# EAGLE board Schematic_openbook v64 (EAGLE 9.7.0)
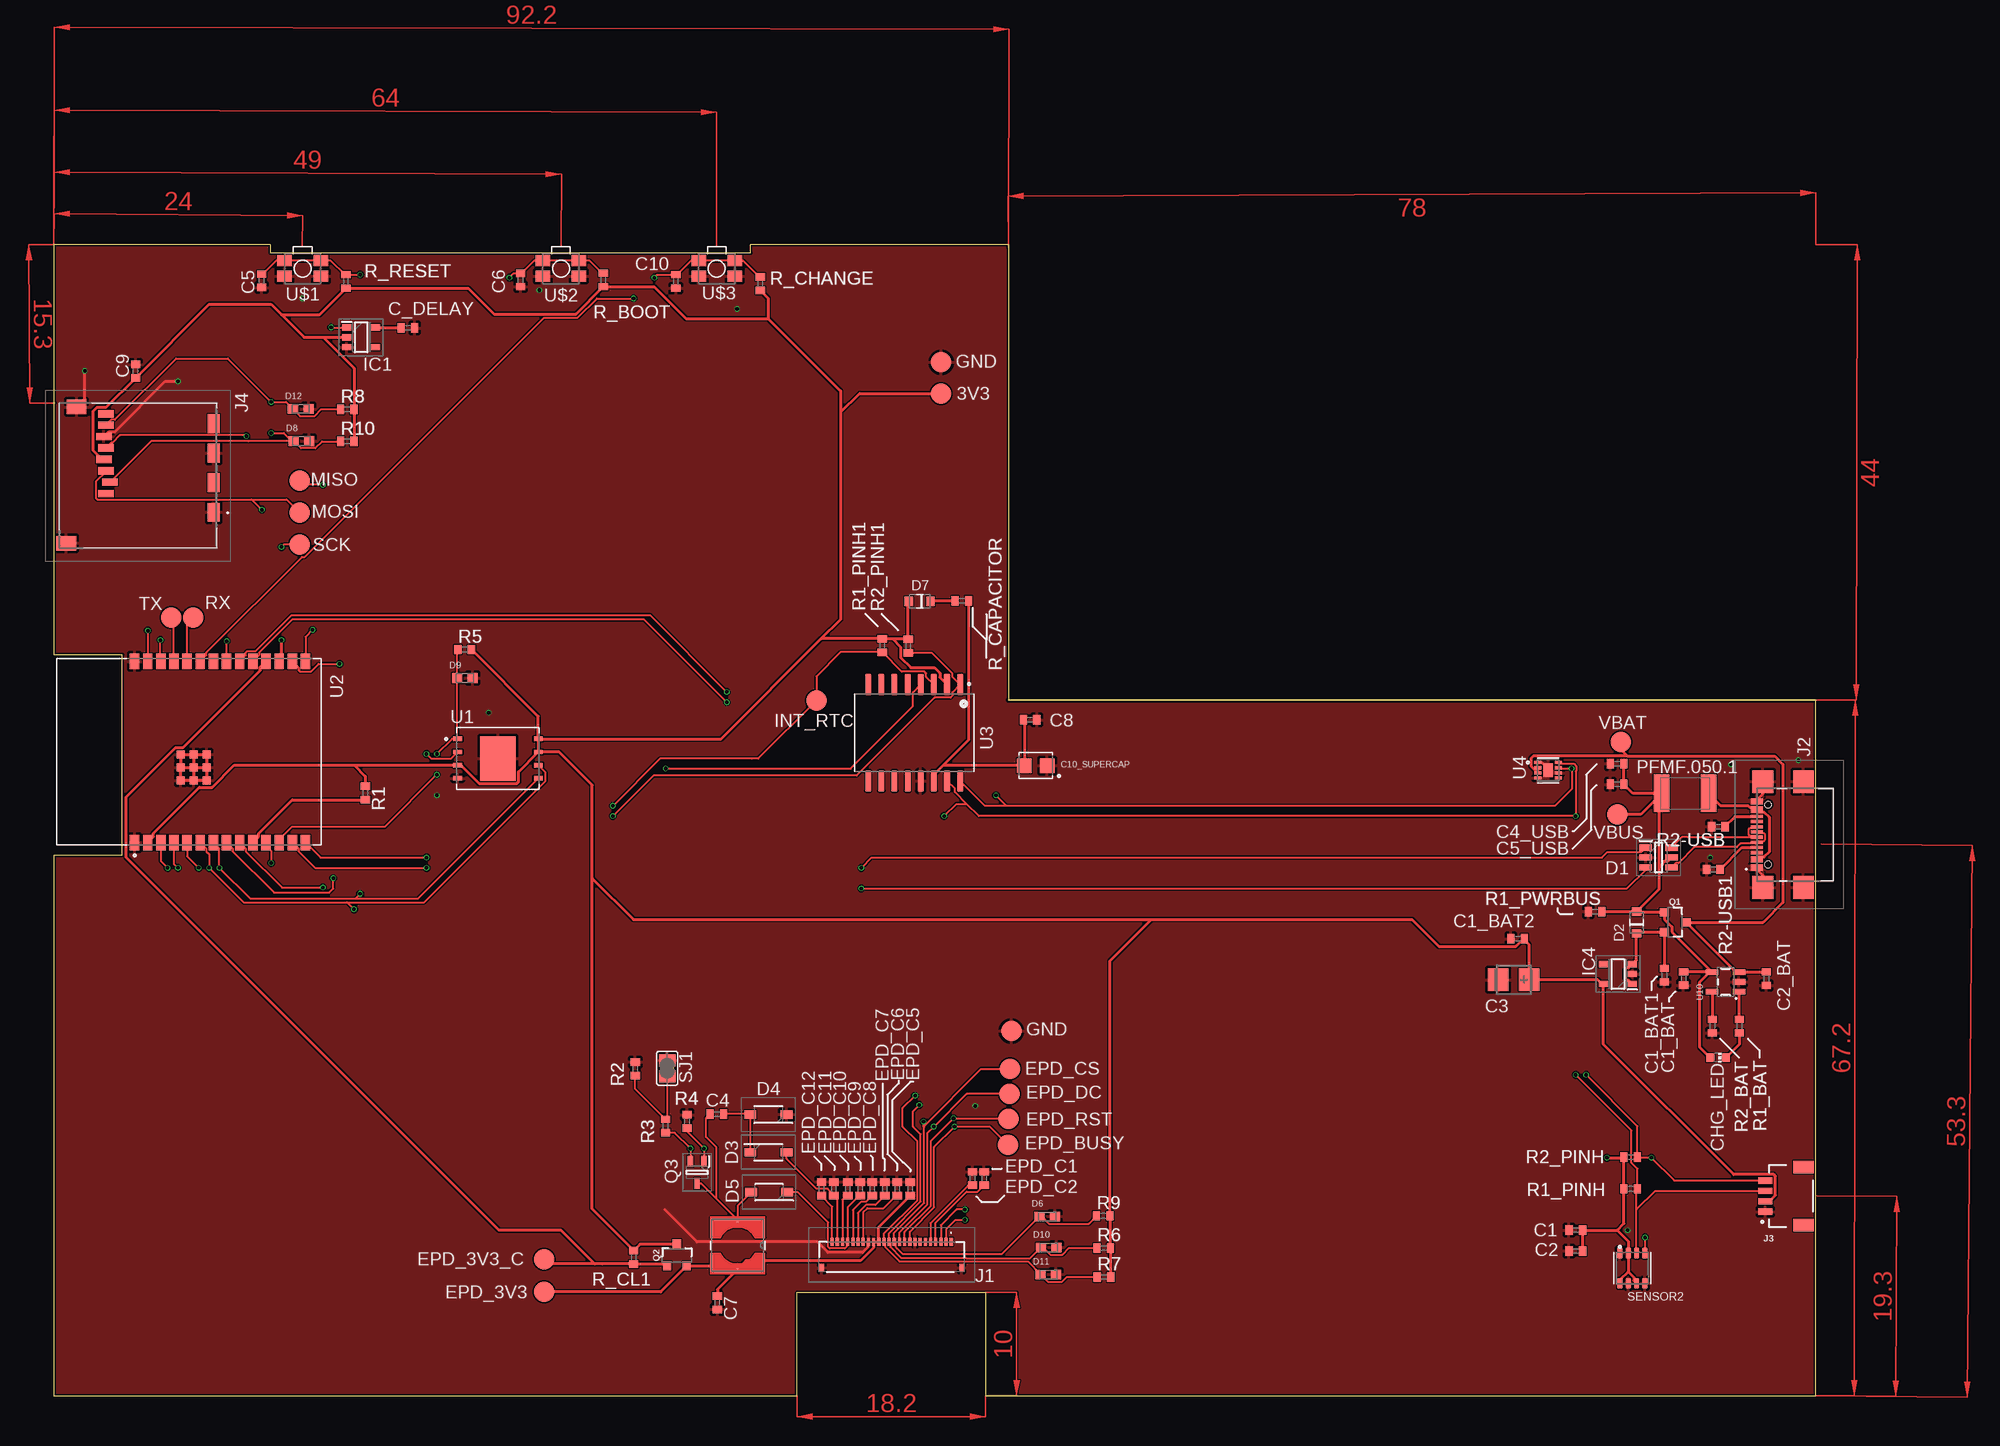
[diagram p0: board, top side]
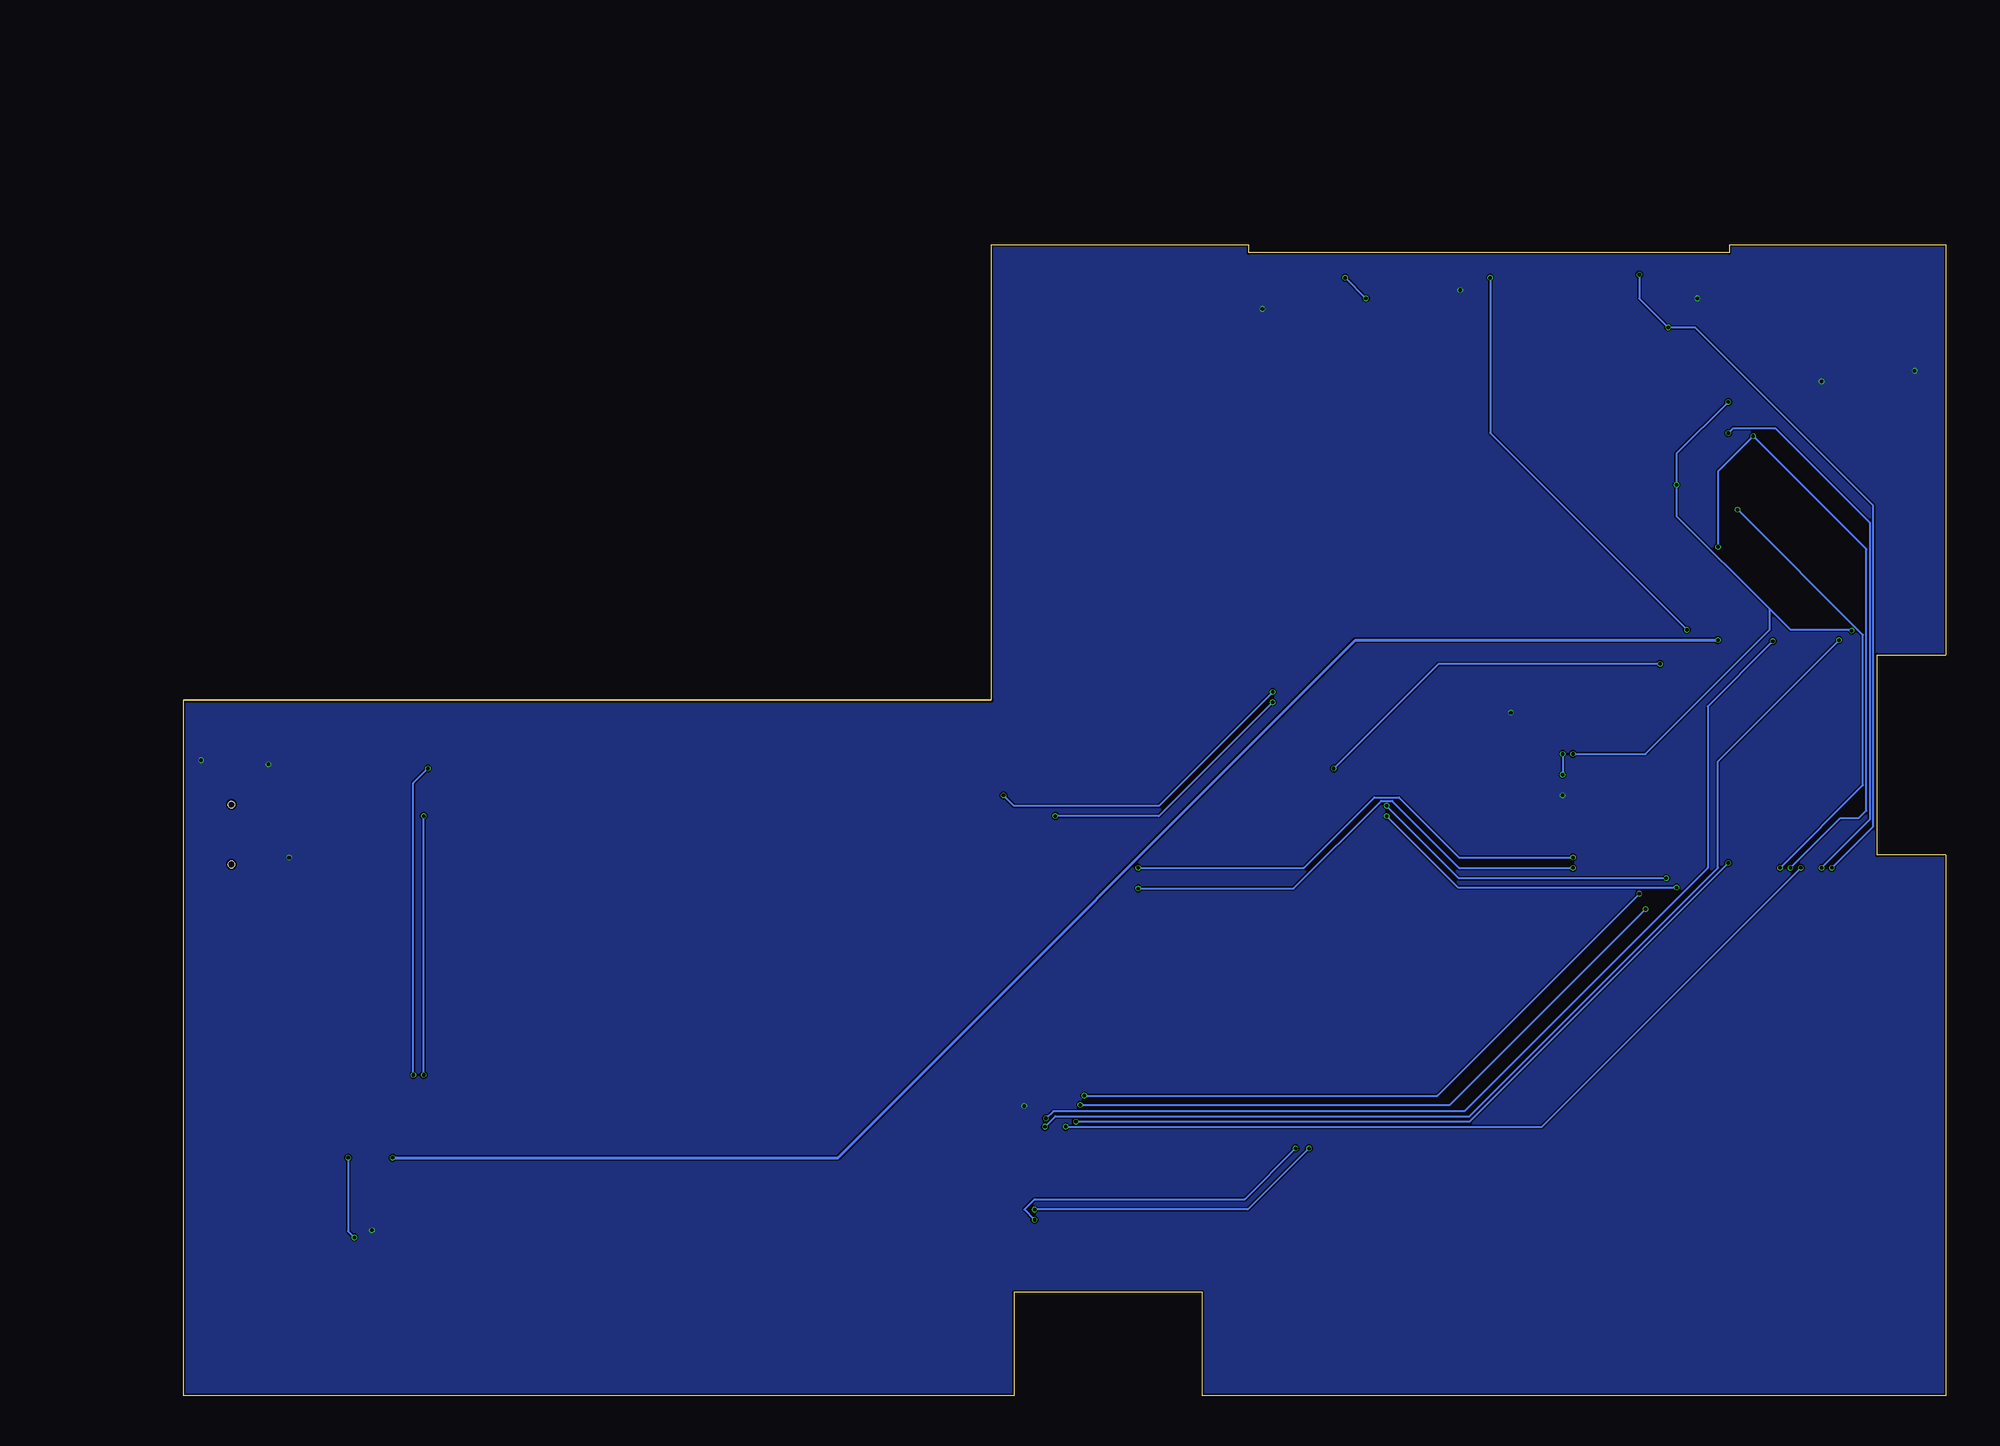
[diagram p1: board, bottom side, seen from below]

Size 170.2 x 111.2 mm. Coordinates in mm from the lower left corner, seen from the top.
Outline: 0,0 71.8,0 71.8,10 90,10 90,0 170.2,0 170.2,67.2 92.2,67.2 92.2,111.2 67.31,111.2 67.31,110.41 20.93,110.41 20.93,111.2 0,111.2 0,71.58 6.62,71.58 6.62,52.23 0,52.23 0,0
Copper layers (1*16): Top 0.035mm / dielectric 1.6mm / Bottom 0.035mm
Design rules "jlcpcb-2layers.dru *": minimum track width 5mil, minimum drill 0.3mm, track to track 5mil, track to pad 5mil, pad to pad 5mil, via to via 5mil, smd to smd 5mil, copper to edge 0.2mm, drill to drill 6mil, minimum pad ring 10mil, minimum via ring 3mil, stop-mask expansion 4mil, vias tented up to drill 0mil, thermal gap 10mil

## Footprints (pad centres in the part's own frame; a part is rotated, then mirrored left to right if it is on the bottom)
EAGLE-LTSPICE_C0402 = smd 0.7 x 0.9: 1 -0.65,0; 2 0.65,0
RCL_CT3528 = smd 2 x 2.2: + -1.5,0; - 1.5,0
CAPCP3225X100N = smd 1.4 x 1.4: 1 -1.1,0; 2 1.1,0
ADAFRUIT_CHIP-LED0603 = smd 0.8 x 0.8: A 0,-0.75; C 0,0.75
SOT95P280X145-6N = smd 1.2 x 0.6: 1 -1.25,0.95; 2 -1.25,0; 3 -1.25,-0.95; 4 1.25,-0.95; 5 1.25,0; 6 1.25,0.95
ESP32_WROVER_AVX---SD0805S020S1R0_AVX_SD0805S020S1R0_0 = smd 0.8 x 0.9: 1 -1.05,0; 2 1.05,0
SOD3716X135N = smd 1.15 x 0.8: 1 -1.75,0; 2 1.75,0
DIOC1608X36N = smd 0.97 x 0.94: 1 -0.75,0; 2 0.75,0
SOT95P280X125-5N = smd 0.9 x 0.6: 1 -1.4,0.95; 2 -1.4,0; 3 -1.4,-0.95; 4 1.4,-0.95; 5 1.4,0.95
SOT95P280X120-5N = smd 0.9 x 0.6: 1 -1.4,0.95; 2 -1.4,0; 3 -1.4,-0.95; 4 1.4,-0.95; 5 1.4,0.95
FH34SRJ24S05SH99 = smd 0.3 x 0.8: 1 5.75,1.45; 2 5.25,1.45; 3 4.75,1.45; 4 4.25,1.45; 5 3.75,1.45; 6 3.25,1.45; 7 2.75,1.45; 8 2.25,1.45; 9 1.75,1.45; 10 1.25,1.45; 11 0.75,1.45; 12 0.25,1.45; 13 -0.25,1.45; 14 -0.75,1.45; 15 -1.25,1.45; 16 -1.75,1.45; 17 -2.25,1.45; 18 -2.75,1.45; 19 -3.25,1.45; 20 -3.75,1.45; 21 -4.25,1.45; 22 -4.75,1.45; 23 -5.25,1.45; 24 -5.75,1.45 | smd 0.4 x 0.8: MP1 6.75,-1.05; MP2 -6.75,-1.05
SAMACSYS_PARTS_USB4110GFA = smd 0.3 x 1.15: A1 -3.35,3.678; A4 -2.55,3.678; A5 -1.25,3.678; A6 -0.25,3.678; A7 0.25,3.678; A8 1.25,3.678; A9 2.55,3.678; A12 3.35,3.678; B1 3.05,3.678; B4 2.25,3.678; B5 1.75,3.678; B6 0.75,3.678; B7 -0.75,3.678; B8 -1.75,3.678; B9 -2.25,3.678; B12 -3.05,3.678 | smd 2.18 x 2: MP1 -5.11,-0.827; MP2 5.11,-0.827; MP3 -5.11,3.103; MP4 5.11,3.103 | hole 0.65: -2.89,2.603; 2.89,2.603
JST04_1MM_RA = smd 0.6 x 1.35: 1 -1.5,0; 2 -0.5,0; 3 0.5,0; 4 1.5,0 | smd 1.2 x 2: NC1 2.8,-3.675; NC2 -2.8,-3.675
112ATAARR03ATTEND = smd 1.8 x 1.2: G1 10.6,10.4; G2 4.9,10.4; S1 7.75,10.4; S2 2.05,10.4 | smd 1.4 x 1.9: G3 13.6,-3.85; G4 0.45,-2.85 | smd 0.7 x 1.5: P1 8.8,0; P2 7.7,0.4; P3 6.6,0; P4 5.5,-0.2; P5 4.4,0; P6 3.3,-0.2; P7 2.2,0; P8 1.1,0
IND_4828-WE-TPC_WRE = smd 0.127 x 0.127: 1 -2.286,0; 2 2.286,0
ESP32C6_VARISTOR_CT/CN1812 = smd 1.5 x 3.6: 1 -2.25,0; 2 2.25,0
ESP32_WROVER_SPARKFUN-DISCRETESEMI_SOT23-3 = smd 0.8 x 0.9: 1 -0.95,-1; 2 0.95,-1; 3 0,1.1
SOT65P210X110-3N = smd 1.05 x 0.5: 1 -1.05,0.65; 2 -1.05,-0.65; 3 1.05,0
ESP32_WROVER_EAGLE-LTSPICE_R0402 = smd 0.7 x 0.9: 1 -0.65,0; 2 0.65,0
ESP32_WROVER_BME680_PSON80P300X300X100-8N = smd 1.016 x 0.5: 1 1.458,1.2; 2 1.458,0.4; 3 1.458,-0.4; 4 1.458,-1.2; 5 -1.458,-1.22; 6 -1.458,-0.4; 7 -1.458,0.4; 8 -1.458,1.2
SJ = smd 1.168 x 1.6: 1 -0.762,0; 2 0.762,0
TP20R = smd 2 x 2: TP 0,0
SON127P600X800X80-9N = smd 0.94 x 0.44: 1 -3.895,1.905; 2 -3.895,0.635; 3 -3.895,-0.635; 4 -3.895,-1.905; 5 3.895,-1.905; 6 3.895,-0.635; 7 3.895,0.635; 8 3.895,1.905 | smd 3.4 x 4.3: 9 0,0
XCVR_ESP32-C6-WROOM-1-N8 = smd 1.5 x 0.9: 1 -8.75,5.26; 2 -8.75,3.99; 3 -8.75,2.72; 4 -8.75,1.45; 5 -8.75,0.18; 6 -8.75,-1.09; 7 -8.75,-2.36; 8 -8.75,-3.63; 9 -8.75,-4.9; 10 -8.75,-6.17; 11 -8.75,-7.44; 12 -8.75,-8.71; 13 -8.75,-9.98; 14 -8.75,-11.25; 15 8.75,-11.25; 16 8.75,-9.98; 17 8.75,-8.71; 18 8.75,-7.44; 19 8.75,-6.17; 20 8.75,-4.9; 21 8.75,-3.63; 22 8.75,-2.36; 23 8.75,-1.09; 24 8.75,0.18; 25 8.75,1.45; 26 8.75,2.72; 27 8.75,3.99; 28 8.75,5.26 | smd 0.8 x 0.8: 29_1 -2.755,0.79; 29_2 -1.505,0.79; 29_3 -0.255,0.79; 29_4 -2.755,-0.46; 29_5 -1.505,-0.46; 29_6 -0.255,-0.46; 29_7 -2.755,-1.71; 29_8 -1.505,-1.71; 29_9 -0.255,-1.71
SOIC127P1032X265-16N = smd 2.05 x 0.59: 1 -4.655,4.445; 2 -4.655,3.175; 3 -4.655,1.905; 4 -4.655,0.635; 5 -4.655,-0.635; 6 -4.655,-1.905; 7 -4.655,-3.175; 8 -4.655,-4.445; 9 4.655,-4.445; 10 4.655,-3.175; 11 4.655,-1.905; 12 4.655,-0.635; 13 4.655,0.635; 14 4.655,1.905; 15 4.655,3.175; 16 4.655,4.445
SON50P200X200X80-9N = smd 0.76 x 0.27: 1 -0.985,0.75; 2 -0.985,0.25; 3 -0.985,-0.25; 4 -0.985,-0.75; 5 0.985,-0.75; 6 0.985,-0.25; 7 0.985,0.25; 8 0.985,0.75 | smd 0.9 x 1.3: 9 0,0
ESP32_WROVER_SPARKFUN-IC-POWER_SOT23-5 = smd 0.55 x 1.2: 1 -0.95,-1.3; 2 0,-1.3; 3 0.95,-1.3; 4 0.95,1.3; 5 -0.95,1.3
MYBUTTON = smd 1.4 x 1.05: 1 1.75,0.75; 2 -1.75,0.75; 3 -1.75,-0.75; 4 1.75,-0.75

## Placement (x,y rotation side)
C1  100nF  [EAGLE-LTSPICE_C0402]  147,16 180 top
C1_BAT  4.7uF  [EAGLE-LTSPICE_C0402]  157.41,40.31 270 top
C1_BAT1  4.7uF  [EAGLE-LTSPICE_C0402]  155.55,40.63 270 top
C1_BAT2  4.7uF  [EAGLE-LTSPICE_C0402]  141.39,44.15 180 top
C2  100nF  [EAGLE-LTSPICE_C0402]  147,14 180 top
C2_BAT  4.7uF  [EAGLE-LTSPICE_C0402]  165.41,40.3 270 top
C3  100uF TANT  [RCL_CT3528]  140.99,40.2 180 top
C4  4.7uF/25V  [EAGLE-LTSPICE_C0402]  64.04,27.23 180 top
C4_USB  100nF  [EAGLE-LTSPICE_C0402]  151,61.07 180 top
C5  1uF  [EAGLE-LTSPICE_C0402]  20.09,107.71 270 top
C5_USB  4.7uF  [EAGLE-LTSPICE_C0402]  151,59.07 180 top
C6  100nF  [EAGLE-LTSPICE_C0402]  45.09,107.78 270 top
C7  10uF  [EAGLE-LTSPICE_C0402]  64.09,8.99 270 top
C8  100nF  [EAGLE-LTSPICE_C0402]  94.3,65.3 0 top
C9  100nF  [EAGLE-LTSPICE_C0402]  7.91,98.98 90 top
C10  100nF  [EAGLE-LTSPICE_C0402]  60.09,107.64 270 top
C10_SUPERCAP  CPH3225A  [CAPCP3225X100N]  94.85,60.88 180 top
C_DELAY  100nF  [EAGLE-LTSPICE_C0402]  34.21,103.15 0 top
CHG_LED  NA  [ADAFRUIT_CHIP-LED0603]  160.75,32.66 270 top
D1  USBLC6-2SC6Y  [SOT95P280X145-6N]  155,52 0 top
D2  ESP32_WROVER_AVX---SD0805S020S1R0_AVX_SD0805S020S1R0_0_0AVX_SD0805S020S1R0_0_0  [ESP32_WROVER_AVX---SD0805S020S1R0_AVX_SD0805S020S1R0_0]  152.86,45.71 90 top
D3  MBR0530  [SOD3716X135N]  69.03,23.53 0 top
D4  MBR0530  [SOD3716X135N]  69.03,27.17 180 top
D5  MBR0530  [SOD3716X135N]  69.09,19.67 180 top
D6  PGB1010603MR  [DIOC1608X36N]  95.95,17.33 0 top
D7  SD0805S020S1R0  [ESP32_WROVER_AVX---SD0805S020S1R0_AVX_SD0805S020S1R0_0]  83.64,76.76 180 top
D8  PGB1010603MR  [DIOC1608X36N]  23.93,92.23 0 top
D9  PGB1010603MR  [DIOC1608X36N]  39.71,69.33 0 top
D10  PGB1010603MR  [DIOC1608X36N]  96.09,14.33 0 top
D11  PGB1010603MR  [DIOC1608X36N]  96.07,11.73 0 top
D12  PGB1010603MR  [DIOC1608X36N]  23.85,95.33 0 top
EPD_C1  1uF/50V  [EAGLE-LTSPICE_C0402]  89.87,21 90 top
EPD_C2  1uF/50V  [EAGLE-LTSPICE_C0402]  88.74,21 90 top
EPD_C5  0.1uF/50V  [EAGLE-LTSPICE_C0402]  82.73,20 90 top
EPD_C6  1uF/50V  [EAGLE-LTSPICE_C0402]  81.47,20 90 top
EPD_C7  1uF/50V  [EAGLE-LTSPICE_C0402]  80.27,20 90 top
EPD_C8  1uF/50V  [EAGLE-LTSPICE_C0402]  79.07,20 90 top
EPD_C9  1uF/50V  [EAGLE-LTSPICE_C0402]  77.9,20 90 top
EPD_C10  1uF/50V  [EAGLE-LTSPICE_C0402]  76.68,20 90 top
EPD_C11  1uF/50V  [EAGLE-LTSPICE_C0402]  75.35,20 90 top
EPD_C12  1uF/50V  [EAGLE-LTSPICE_C0402]  74.15,20 90 top
IC1  BD5229G-TR  [SOT95P280X125-5N]  29.69,102.25 0 top
IC4  XC6220A331MR-G  [SOT95P280X120-5N]  151.07,40.75 180 top
J1  FH34SRJ-24S-0.5SH_99_  [FH34SRJ24S05SH99]  80.93,13.42 0 top
J2  SAMACSYS_PARTS_USB4110-GF-A  [SAMACSYS_PARTS_USB4110GFA]  168.17,54.22 90 top
J3  QWIIC_RIGHT_ANGLE  [JST04_1MM_RA]  165.32,19.3 90 top
J4  112A-TAAR-R03_ATTEND  [112ATAARR03ATTEND]  5.05,95.96 270 top
L1  68uH  [IND_4828-WE-TPC_WRE]  66.05,14.53 270 top
PFMF.050.1  ESP32C6_VARISTORCN1812  [ESP32C6_VARISTOR_CT/CN1812]  157.56,58.2 180 top
Q1  20V/4.2A/52mΩ/1.4W  [ESP32_WROVER_SPARKFUN-DISCRETESEMI_SOT23-3]  156.56,45.74 270 top
Q2  20V/4.2A/52mΩ/1.4W  [ESP32_WROVER_SPARKFUN-DISCRETESEMI_SOT23-3]  60.18,13.56 0 top
Q3  SI1308EDL-T1-GE3  [SOT65P210X110-3N]  62.14,21.59 270 top
R1  10K  [ESP32_WROVER_EAGLE-LTSPICE_R0402]  30.09,58.23 270 top
R1_BAT  200  [ESP32_WROVER_EAGLE-LTSPICE_R0402]  162.79,35.71 90 top
R1_PINH  10K  [ESP32_WROVER_EAGLE-LTSPICE_R0402]  152.3,20 180 top
R1_PINH1  10K  [ESP32_WROVER_EAGLE-LTSPICE_R0402]  80.03,72.48 90 top
R1_PWRBUS  100K  [ESP32_WROVER_EAGLE-LTSPICE_R0402]  148.87,46.77 0 top
R2  2.2  [ESP32_WROVER_EAGLE-LTSPICE_R0402]  56.17,31.59 270 top
R2-USB  5K1  [ESP32_WROVER_EAGLE-LTSPICE_R0402]  160.77,54.99 180 top
R2-USB1  5K1  [ESP32_WROVER_EAGLE-LTSPICE_R0402]  160.29,50.85 0 top
R2_BAT  2K  [ESP32_WROVER_EAGLE-LTSPICE_R0402]  160.19,35.72 90 top
R2_PINH  10K  [ESP32_WROVER_EAGLE-LTSPICE_R0402]  152.3,23.07 180 top
R2_PINH1  10K  [ESP32_WROVER_EAGLE-LTSPICE_R0402]  82.53,72.42 90 top
R3  0.47  [ESP32_WROVER_EAGLE-LTSPICE_R0402]  59.09,26.07 270 top
R4  10k  [ESP32_WROVER_EAGLE-LTSPICE_R0402]  61.17,26.51 270 top
R5  10K  [ESP32_WROVER_EAGLE-LTSPICE_R0402]  39.69,72.09 0 top
R6  10K  [ESP32_WROVER_EAGLE-LTSPICE_R0402]  101.41,14.29 0 top
R7  10K  [ESP32_WROVER_EAGLE-LTSPICE_R0402]  101.43,11.49 0 top
R8  10K  [ESP32_WROVER_EAGLE-LTSPICE_R0402]  28.35,95.29 0 top
R9  10K  [ESP32_WROVER_EAGLE-LTSPICE_R0402]  101.37,17.39 0 top
R10  10K  [ESP32_WROVER_EAGLE-LTSPICE_R0402]  28.35,92.19 0 top
R_BOOT  10K  [ESP32_WROVER_EAGLE-LTSPICE_R0402]  53.07,107.79 90 top
R_CAPACITOR  15  [ESP32_WROVER_EAGLE-LTSPICE_R0402]  87.7,76.8 0 top
R_CHANGE  10K  [ESP32_WROVER_EAGLE-LTSPICE_R0402]  68.23,107.44 90 top
R_CL1  10K  [ESP32_WROVER_EAGLE-LTSPICE_R0402]  56.01,13.39 270 top
R_RESET  10K  [ESP32_WROVER_EAGLE-LTSPICE_R0402]  28.23,107.64 90 top
SENSOR2  BME688  [ESP32_WROVER_BME680_PSON80P300X300X100-8N]  152.47,12.34 90 top
SJ1  NA  [SJ]  59.25,31.64 270 top
TP1  TPTP20R  [TP20R]  11.32,75.17 0 top
TP2  TPTP20R  [TP20R]  13.45,75.17 0 top
TP3  TPTP20R  [TP20R]  151.37,63.17 0 top
TP4  TPTP20R  [TP20R]  85.71,99.83 180 top
TP5  TPTP20R  [TP20R]  92.49,35.25 0 top
TP6  TPTP20R  [TP20R]  23.75,88.41 90 top
TP7  TPTP20R  [TP20R]  23.75,85.33 90 top
TP8  TPTP20R  [TP20R]  23.75,82.25 90 top
TP9  TPTP20R  [TP20R]  92.17,24.25 0 top
TP10  TPTP20R  [TP20R]  92.36,31.57 0 top
TP11  TPTP20R  [TP20R]  92.31,29.17 0 top
TP12  TPTP20R  [TP20R]  92.21,26.77 0 top
TP13  TPTP20R  [TP20R]  47.36,13.17 0 top
TP14  TPTP20R  [TP20R]  151.01,56.17 0 top
TP15  TPTP20R  [TP20R]  73.66,67.17 0 top
TP16  TPTP20R  [TP20R]  85.69,96.83 180 top
TP17  TPTP20R  [TP20R]  47.36,10.04 0 top
U1  W25Q512JVEIQ  [SON127P600X800X80-9N]  42.9,61.56 0 top
U2  ESP32-C6-WROOM-1-N8  [XCVR_ESP32-C6-WROOM-1-N8]  13.06,62.2 90 top
U3  DS3231SN#  [SOIC127P1032X265-16N]  83.1,64.05 270 top
U4  MAX17048G+T10  [SON50P200X200X80-9N]  144.33,60.42 0 top
U10  MCP73831  [ESP32_WROVER_SPARKFUN-IC-POWER_SOT23-5]  161.47,39.99 90 top
U$1  RESET_BUTTON  [MYBUTTON]  24.04,108.9 180 top
U$2  BOOT_BUTTON  [MYBUTTON]  48.99,108.9 180 top
U$3  CHANGE_BUTTON  [MYBUTTON]  64.04,108.9 180 top

## Library data of the parts
C1 C1_BAT C1_BAT1 C1_BAT2 C2 C2_BAT C4 C4_USB C5 C5_USB C6-C10 C_DELAY EPD_C1 EPD_C2 EPD_C5-EPD_C12 = DeskAssistant v19 v1; SPICEMODEL: NONE; SPICEPREFIX: C
C3 = DeskAssistant v19 v1; SPICEPREFIX: C
C10_SUPERCAP = DeskAssistant v19 v1; AVAILABILITY: Not in stock; CHECK_PRICES: https://www.snapeda.com/parts/CPH3225A/Seiko+Instruments/view-part/?ref=eda; DESCRIPTION: 11 mF (EDLC) Supercapacitor 3.3 V 1210 (3225 Metric) - -; MF: Seiko Instruments; MP: CPH3225A; PACKAGE: 1210 Seiko; PRICE: None; PURCHASE-URL: https://www.snapeda.com/api/url_track_click_mouser/?unipart_id=562593&manufacturer=Seiko Instruments&part_name=CPH3225A&search_term=None; SNAPEDA_LINK: https://www.snapeda.com/parts/CPH3225A/Seiko+Instruments/view-part/?ref=snap
CHG_LED PFMF.050.1 SJ1 TP1-TP17 U$1-U$3 = DeskAssistant v19 v1
D1 = DeskAssistant v19 v1; AVAILABILITY: In Stock; CHECK_PRICES: https://www.snapeda.com/parts/USBLC6-2SC6Y/STMicroelectronics/view-part/?ref=eda; DESCRIPTION: 17V Clamp 5A (8/20µs) Ipp Tvs Diode Surface Mount SOT-23-6; MF: STMicroelectronics; MP: USBLC6-2SC6Y; PACKAGE: SOT-23-6 STMicroelectronics; PRICE: None; SNAPEDA_LINK: https://www.snapeda.com/parts/USBLC6-2SC6Y/STMicroelectronics/view-part/?ref=snap
D2 D7 = DeskAssistant v19 v1; CENTROID_NOT_SPECIFIED: No; DATASHEET: http://datasheets.avx.com/schottky.pdf; DIGIKEY_DESCRIPTION: DIODE SCHOTTKY 20V 1A 0805; DIGIKEY_PART_NUMBER: 478-7800-1-ND; LEAD_FREE: yes; MF: AVX; MOUSER_PART_NUMBER: 581-SD0805S020S1R0; PACKAGE: 0805 (2012 metric); PREFIX: D; ROHS: yes; TEMPERATURE_RANGE_HIGH: +125°C; TEMPERATURE_RANGE_LOW: -55°C
D3-D5 = DeskAssistant v19 v1; AVAILABILITY: In Stock; CHECK_PRICES: https://www.snapeda.com/parts/MBR0530/Onsemi/view-part/?ref=eda; DESCRIPTION: Diode Schottky 30 V 500mA Surface Mount SOD-123; MF: ON Semiconductor; MP: MBR0530; PACKAGE: SOD-123-2 ON Semiconductor; PRICE: None; PURCHASE-URL: https://www.snapeda.com/api/url_track_click_mouser/?unipart_id=179458&manufacturer=ON Semiconductor&part_name=MBR0530&search_term=None; SNAPEDA_LINK: https://www.snapeda.com/parts/MBR0530/Onsemi/view-part/?ref=snap
D6 D8-D12 = DeskAssistant v19 v1; AVAILABILITY: In Stock; CHECK_PRICES: https://www.snapeda.com/parts/PGB1010603MR/Littelfuse/view-part/?ref=eda; DESCRIPTION: 150V (Typ) Clamp - Ipp Tvs Diode Surface Mount 0603 (1608 Metric); MF: Littelfuse Inc.; MP: PGB1010603MR; PACKAGE: 0603 Littelfuse Inc.; PRICE: None; PURCHASE-URL: https://www.snapeda.com/api/url_track_click_mouser/?unipart_id=5659453&manufacturer=Littelfuse Inc.&part_name=PGB1010603MR&search_term=None; SNAPEDA_LINK: https://www.snapeda.com/parts/PGB1010603MR/Littelfuse/view-part/?ref=snap
IC1 = DeskAssistant v19 v1; DESCRIPTION: Voltage Detector with Adjustable Delay Time: CMOS processes are utilized to develop high precision, low current consumption CMOS reset ICs that allow arbitrary setting of the delay time. The extensive lineup includes both Nch Open Drain and CMOS output types in a wide range of detection voltages (from 2.3V to 6.0V, in 0.1V steps), enabling selection of the ideal solution based on customer requirements. In addition, the entire series is of course both lead-free and RoHS-compliant.; HEIGHT: 1.25mm; MANUFACTURER_NAME: ROHM Semiconductor; MANUFACTURER_PART_NUMBER: BD5229G-TR; MOUSER_PART_NUMBER: 755-BD5229G-TR; MOUSER_PRICE-STOCK: https://www.mouser.co.uk/ProductDetail/ROHM-Semiconductor/BD5229G-TR?qs=4kLU8WoGk0vvnhrrYwdszw%3D%3D
IC4 = DeskAssistant v19 v1; DESCRIPTION: LDO Voltage Regulators; HEIGHT: 1.2mm; MANUFACTURER_NAME: Torex; MANUFACTURER_PART_NUMBER: XC6220A331MR-G; MOUSER_PART_NUMBER: 865-XC6220A331MR-G; MOUSER_PRICE-STOCK: https://www.mouser.co.uk/ProductDetail/Torex-Semiconductor/XC6220A331MR-G?qs=AsjdqWjXhJ8ZSWznL1J0gg%3D%3D
J1 = DeskAssistant v19 v1; DESCRIPTION: 24 Position FFC, FPC Connector Contacts, Top and Bottom 0.020" (0.50mm) Surface Mount, Right Angle; HEIGHT: 1.1mm; MANUFACTURER_NAME: Hirose; MANUFACTURER_PART_NUMBER: FH34SRJ-24S-0.5SH(99); MOUSER_PART_NUMBER: 798-FH34SRJ24S05SH99; MOUSER_PRICE-STOCK: https://www.mouser.co.uk/ProductDetail/Hirose-Connector/FH34SRJ-24S-0.5SH99?qs=vcbW%252B4%252BSTIpKBl5ap9J8Fw%3D%3D
J2 = DeskAssistant v19 v1; DESCRIPTION: CONN USB 2.0 TYPE-C R/A SMT; HEIGHT: 3.26mm; MANUFACTURER_NAME: GCT (GLOBAL CONNECTOR TECHNOLOGY); MANUFACTURER_PART_NUMBER: USB4110-GF-A; MOUSER_PART_NUMBER: 640-USB4110-GF-A; MOUSER_PRICE-STOCK: https://www.mouser.co.uk/ProductDetail/GCT/USB4110-GF-A?qs=KUoIvG%2F9IlYiZvIXQjyJeA%3D%3D
J3 = DeskAssistant v19 v1; PROD_ID: CONN-13694
J4 = DeskAssistant v19 v1; DESCRIPTION: Micro SD Card Socket, Push-Push Type, Top Mount, SMT, H=1.83mm, 10u; HEIGHT: 1.9mm; MANUFACTURER_NAME: ATTEND; MANUFACTURER_PART_NUMBER: 112A-TAAR-R03 ATTEND
L1 = DeskAssistant v19 v1; COPYRIGHT: Copyright (C) 2024 Ultra Librarian. All rights reserved.; MANUFACTURER_PART_NUMBER: 744043680; MFR_NAME: Wurth Electronics
Q1 Q2 = DeskAssistant v19 v1; PROD_ID: TRAN-14388
Q3 = DeskAssistant v19 v1; AVAILABILITY: In Stock; CHECK_PRICES: https://www.snapeda.com/parts/SI1308EDL-T1-GE3/Vishay+Siliconix/view-part/?ref=eda; DESCRIPTION: Si1308EDL-T1-GE3 N-channel MOSFET Transistor, 1.5 A, 30 V, 3-Pin SC-70 | Siliconix / Vishay SI1308EDL-T1-GE3; MF: Vishay Siliconix; MP: SI1308EDL-T1-GE3; PACKAGE: SOT-323 Vishay Semiconductor; PRICE: None; PURCHASE-URL: https://www.snapeda.com/api/url_track_click_mouser/?unipart_id=274603&manufacturer=Vishay Siliconix&part_name=SI1308EDL-T1-GE3&search_term=None; SNAPEDA_LINK: https://www.snapeda.com/parts/SI1308EDL-T1-GE3/Vishay+Siliconix/view-part/?ref=snap
R1 R1_BAT R1_PINH R1_PINH1 R1_PWRBUS R2 R2-USB R2-USB1 R2_BAT R2_PINH R2_PINH1 R3-R10 R_BOOT R_CAPACITOR R_CHANGE R_CL1 R_RESET = DeskAssistant v19 v1; SPICEMODEL: NONE; SPICEPREFIX: R
SENSOR2 = DeskAssistant v19 v1; AVAILABILITY: Unavailable; DESCRIPTION: Integrated Environmental Unit; MF: Bosch Sensortec; MP: BME680; PACKAGE: LGA-8 Bosch Tools; PRICE: None
U1 = DeskAssistant v19 v1; AVAILABILITY: In Stock; CHECK_PRICES: https://www.snapeda.com/parts/W25Q512JVEIQ/Winbond+Electronics/view-part/?ref=eda; DESCRIPTION: FLASH - NOR Memory IC 512Mb (64M x 8) SPI - Quad I/O 133 MHz 8-WSON (8x6); MF: Winbond Electronics; MP: W25Q512JVEIQ; PACKAGE: Package; PRICE: None; SNAPEDA_LINK: https://www.snapeda.com/parts/W25Q512JVEIQ/Winbond+Electronics/view-part/?ref=snap
U2 = DeskAssistant v19 v1; AVAILABILITY: In Stock; CHECK_PRICES: https://www.snapeda.com/parts/ESP32-C6-WROOM-1-N8/Espressif+Systems/view-part/?ref=eda; DESCRIPTION: Multiprotocol Modules ESP32-C6 module, Wi-Fi 6 in 2.4 GHz band, Bluetooth 5, Zigbee 3.0 and Thread. ESP34-WROOM Compatible - ENGINEERING SAMPLE; MF: Espressif Systems; MP: ESP32-C6-WROOM-1-N8; PACKAGE: None; PRICE: None; SNAPEDA_LINK: https://www.snapeda.com/parts/ESP32-C6-WROOM-1-N8/Espressif+Systems/view-part/?ref=snap
U3 = DeskAssistant v19 v1; AVAILABILITY: In Stock; CHECK_PRICES: https://www.snapeda.com/parts/DS3231SN%23/Analog+Devices/view-part/?ref=eda; DESCRIPTION: Extremely Accurate I²C-Integrated RTC/TCXO/Crystal; MF: Analog Devices; MP: DS3231SN#; PACKAGE: SOIC-16 Maxim; PRICE: None; PURCHASE-URL: https://www.snapeda.com/api/url_track_click_mouser/?unipart_id=99048&manufacturer=Analog Devices&part_name=DS3231SN#&search_term=None; SNAPEDA_LINK: https://www.snapeda.com/parts/DS3231SN%23/Analog+Devices/view-part/?ref=snap
U4 = DeskAssistant v19 v1; AVAILABILITY: In Stock; CHECK_PRICES: https://www.snapeda.com/parts/MAX17048G+T10/Analog+Devices/view-part/?ref=eda; DESCRIPTION: 3µA 1-Cell/2-Cell Fuel Gauge with ModelGauge; MF: Analog Devices; MP: MAX17048G+T10; PACKAGE: TDFN-8 Maxim; PRICE: None; PURCHASE-URL: https://www.snapeda.com/api/url_track_click_mouser/?unipart_id=329239&manufacturer=Analog Devices&part_name=MAX17048G+T10&search_term=None; SNAPEDA_LINK: https://www.snapeda.com/parts/MAX17048G+T10/Analog+Devices/view-part/?ref=snap
U10 = DeskAssistant v19 v1; PROD_ID: IC-09995

## Nets
3V3: C1_BAT2.1 C3.+ C9.1 D7.2 IC1.2 IC4.5 J3.2 J4.P4 Q2.3 R1.1 R1_PINH1.2 R2_PINH1.2 R5.2 R6.2 R7.2 R8.2 R9.2 R10.2 R_BOOT.1 R_CHANGE.1 R_CL1.1 R_RESET.1 TP16.TP U1.3 U1.7 U1.8 U2.2 U3.2
32KHZ: R2_PINH1.1 U2.9 U3.1
DN: D1.4 J2.A7 J2.B7
DP: D1.6 J2.A6 J2.B6
EPD_3V3: C7.1 EPD_C5.1 J1.15 J1.16 L1.2 Q2.2 TP17.TP
EPD_3V3_C: Q2.1 R_CL1.2 TP13.TP U2.18
EPD_BUSY: J1.9 TP9.TP U2.26
EPD_CS: D6.1 J1.12 R9.1 TP10.TP U2.11
EPD_DC: J1.11 TP11.TP U2.5
EPD_RST: J1.10 TP12.TP U2.21
FLASH_CS: D9.1 R5.1 U1.1 U2.12
GDR: J1.2 Q3.1 R4.2
GND: C1.2 C1_BAT1.2 C1_BAT2.2 C1_BAT.2 C2.2 C2_BAT.2 C3.- C4_USB.2 C5.2 C5_USB.2 C6.2 C7.2 C8.2 C9.2 C10.2 C10_SUPERCAP.1 C_DELAY.2 D1.2 D4.1 D6.2 D8.2 D9.2 D10.2 D11.2 D12.2 EPD_C1.2 EPD_C2.2 EPD_C5.2 EPD_C6.2 EPD_C7.2 EPD_C8.2 EPD_C9.2 EPD_C10.2 EPD_C11.2 EPD_C12.2 IC1.3 IC4.2 J1.8 J1.17 J1.MP1 J1.MP2 J2.A1 J2.A12 J2.B1 J2.B12 J2.MP1 J2.MP2 J2.MP3 J2.MP4 J3.1 J4.G1 J4.G2 J4.G3 J4.G4 J4.P6 R1_PWRBUS.1 R2-USB1.1 R2-USB.2 R2.1 R2_BAT.1 R4.1 SENSOR2.1 SENSOR2.5 SENSOR2.7 SJ1.1 TP4.TP TP5.TP U1.4 U1.9 U2.1 U2.28 U2.29_1 U2.29_2 U2.29_3 U2.29_4 U2.29_5 U2.29_6 U2.29_7 U2.29_8 U2.29_9 U3.13 U4.1 U4.4 U4.6 U4.9 U10.2 U$1.1 U$1.2 U$2.1 U$2.2 U$3.1 U$3.2
GPIO8: R1.2 U2.10
I2C_PW: C1.1 C2.1 R1_PINH.2 R2_PINH.2 SENSOR2.2 SENSOR2.6 SENSOR2.8 U2.17
INT_RTC: R1_PINH1.1 TP15.TP U2.8 U3.3
IO/BOOT: C6.1 R_BOOT.2 U2.15 U$2.3 U$2.4
IO/CHANGE: C10.1 R_CHANGE.2 U2.23 U$3.3 U$3.4
MISO: D12.1 J4.P7 R8.1 TP6.TP U1.2 U2.27
MOSI: D11.1 J1.14 J4.P3 R7.1 TP7.TP U1.5 U2.7
N$1: C1_BAT1.1 D2.1 IC4.1 IC4.3 Q1.2
N$2: J2.B5 R2-USB.1
N$3: CHG_LED.C R1_BAT.1
N$4: R1_BAT.2 U10.1
N$5: EPD_C1.1 J1.4
N$6: J2.A5 R2-USB1.2
N$7: C4.1 D3.1 D4.2
N$8: R2_BAT.2 U10.5
N$9: EPD_C2.1 J1.5
N$10: EPD_C6.1 J1.18
N$11: EPD_C7.1 J1.19
N$12: EPD_C8.1 J1.20
N$13: C_DELAY.1 IC1.5
N$14: EPD_C10.1 J1.22
N$15: D7.1 R_CAPACITOR.1
N$16: EPD_C12.1 J1.24
PREVGH: D5.1 EPD_C9.1 J1.21
PREVGL: D3.2 EPD_C11.1 J1.23
RESE: J1.3 Q3.2 R3.2
RESE': R2.2 R3.1 SJ1.2
RESET: C5.1 IC1.1 R_RESET.2 U2.3 U$1.3 U$1.4
RTC_RST: U2.16 U3.4
RX: TP2.TP U2.24
SCK: D10.1 J1.13 J4.P5 R6.1 TP8.TP U1.6 U2.6
SCL: J3.4 R2_PINH.1 SENSOR2.4 U2.20 U3.16 U4.7
SDA: J3.3 R1_PINH.1 SENSOR2.3 U2.19 U3.15 U4.8
SRC: C4.2 D5.2 L1.1 Q3.3
SS_SD: D8.1 J4.P2 R10.1 U2.4
TX: TP1.TP U2.25
USB_D+: D1.1 U2.14
USB_D-: D1.3 U2.13
VBAT: C2_BAT.1 Q1.3 TP3.TP U4.2 U4.3 U10.3
VBUS: C1_BAT.1 C4_USB.1 C5_USB.1 CHG_LED.A D1.5 D2.2 PFMF.050.1.2 Q1.1 R1_PWRBUS.2 TP14.TP U10.4
VRTC: C8.1 C10_SUPERCAP.2 R_CAPACITOR.2 U3.14
VUSB: J2.A4 J2.A9 J2.B4 J2.B9 PFMF.050.1.1

## Tracks (layer width: path | path; a pad name or v marks a point on that pad's centre or on a via)
3V3
  Top 0.3: 22,104.43 25.67,104.43 R_RESET.1 40.04,106.99 42.52,104.5 50.43,104.5 R_BOOT.1 58,107.14 61.07,104.07 69,104.07 | J4.P4 4.66,90.46 3.82,91.3 3.82,95.12 4.18,95.49 5.07,95.49 C9.1 15.01,105.43 21,105.43 22,104.43 | U1.8 U1.7 | U1.8 64.47,63.47 74.13,73.13 | 74.13,73.13 76,75 76,95 | 68.28,106.79 R_CHANGE.1 69,106.02 69,104.07 | 69,104.07 76,97.07 76,95 | 22,104.43 24.18,102.25 26,102.25 | 26,102.25 IC1.2 | U2.2 9.61,53.99 9.61,54.31 14.07,58.77 15.29,58.77 17.44,60.92 29,60.92 | 29,60.92 U1.3 39.29,60.92 41.09,59.13 44.72,59.13 44.88,59.3 44.88,60.28 U1.7 | 29,60.92 30.09,59.84 R1.1 | J3.2 165.7,18.8 166.28,19.38 166.28,21.21 166.12,21.38 162.24,21.38 149.67,33.95 IC4.5 149.52,39.8 149.12,40.2 C3.+ 142.49,43.6 142.04,44.05 C1_BAT2.1 141.93,44.15 141.21,43.42 133.77,43.42 131.19,46 106,46 | R7.2 102.06,11.51 R6.2 102.02,14.33 R9.2 102.02,42.02 106,46 | 26,102.25 29,99.25 R8.2 R10.2 | Q2.3 56.63,14.66 R_CL1.1 52,18.05 52,50 | R5.2 46.8,65.64 U1.8 | 76,95 77.83,96.83 TP16.TP | 52,50 52,59 48.8,62.2 U1.7 | 52,50 56,46 106,46 | 81,73.13 R1_PINH1.2 74.13,73.13 | 81,73.13 82.47,73.13 R2_PINH1.2 82.53,76.7 D7.2 | 81,73.13 81.8,72.33 81.8,71.31 82.77,70.33 85.05,70.33 85.58,69.8 85.58,69.4 U3.2
32KHZ  (via drill 0.35)
  Top 0.2: U2.9 18.55,52.86 18.55,52.61 22.06,49.1 v26,49.1 | v54,56 57.91,59.91 77.54,59.91 85.08,67.45 86.62,67.45 86.8,67.63 86.8,67.96 U3.1 86.8,69.45 86.8,69.78 84.81,71.77 R2_PINH1.1
  Bottom 0.2: v54,56 47.1,49.1 v26,49.1
DN
  Top 0.2: J2.A7 164.62,54.34 165.16,54.34 165.3,54.21 165.3,53.72 165.16,53.59 164.62,53.59 J2.B7 164.37,53.34 162.9,53.34 162.56,53 158.47,53 156.94,51.47 156.67,51.47 D1.4 156.55,51.05
DP
  Top 0.2: J2.B6 164.37,54.84 163.83,54.84 163.69,54.71 163.69,54.22 163.83,54.09 164.37,54.09 J2.A6 158,53.97 157.8,53.97 157.27,53.97 D1.6
EPD_3V3
  Top 0.3: EPD_C5.1 79.68,16.3 J1.15 J1.16 79.18,14.32 77.9,13.05 66.85,13.05 L1.2 | L1.2 65.73,12.56 Q2.2 58.61,10.04 TP17.TP | L1.2 64.09,10.28 C7.1
EPD_3V3_C
  Top 0.3: Q2.1 59.05,12.74 R_CL1.2 53,12.74 52.26,12.74 | 52.26,12.74 47.79,12.74 TP13.TP | U2.18 19.96,70.41 19.96,70.08 12.49,62.62 11.76,62.62 7,57.87 7,52 43,16 49,16 52.26,12.74
EPD_BUSY  (via drill 0.35)
  Top 0.2: J1.9 82.68,15.87 85.04,18.23 85.04,24.04 v87,26 90.42,26 TP9.TP | U2.26 10.3,70.99 v10.3,73
  Bottom 0.2: v10.3,73 22,61.3 22,51 46,27 86,27 v87,26
EPD_CS  (via drill 0.35)
  Top 0.2: R9.1 99.96,16.63 96.12,16.63 95.42,17.33 D6.1 91.57,13.7 82,13.7 81.46,14.24 81.44,14.24 81.3,14.38 81.3,14.75 J1.12 81.18,15.75 84.06,18.64 84.06,25.94 84,26 | 84,26 89.57,31.57 TP10.TP | 84,26 v84,26.48 | U2.11 20.5,53.15 21,52.65 v21,51.48
  Bottom 0.2: v21,51.48 46,26.48 v84,26.48
EPD_DC  (via drill 0.35)
  Top 0.2: J1.11 81.68,15.79 84.39,18.5 84.39,25.39 v85,26 88.17,29.17 TP11.TP 91.56,29.17 | U2.5 12.88,52.12 v14,51
  Bottom 0.2: v85,26 39,26 v14,51
EPD_RST  (via drill 0.35)
  Top 0.2: J1.10 82.18,15.83 84.72,18.36 84.72,24.61 v86.9,26.8 86.93,26.77 TP12.TP | U2.21 v16.7,72.9
  Bottom 0.2: v16.7,72.9 23,66.6 23,51 46.5,27.5 86.2,27.5 v86.9,26.8
FLASH_CS  (via drill 0.35)
  Top 0.2: R5.1 38.96,72.01 D9.1 38.96,63.51 U1.1 38.47,63.47 v37,62 | v37,60 31.98,54.98 23,54.98 21.77,53.75 U2.12
  Bottom 0.2: v37,62 v37,60
GDR  (via drill 0.35)
  Top 0.2: J1.2 86.18,16.08 87.1,17 v88,17 | Q3.1 v62.8,23.9 61.17,25.53 R4.2
  Bottom 0.2: v88,17 89,18 88,19 67.7,19 v62.8,23.9
GND  (via drill 0.35)
  Top 0.3: U4.9 144,60.75 144,60.9 143.73,61.17 U4.1 | U2.29_2 U2.29_3 U2.29_6 | U2.29_2 U2.29_1 U2.29_4 | U2.29_4 U2.29_7 U2.29_8 | U2.29_8 U2.29_9 U2.29_6 | U2.29_2 U2.29_5 | U2.29_6 U2.29_5 | U2.29_5 U2.29_8 | U2.29_5 U2.29_4 | 59,18 62.13,14.87 73.78,14.87 74.78,13.87 78.12,13.87 78.61,14.36 78.61,14.8 J1.17 | J4.P6 5.32,93.13 5.92,93.13 10.78,98 v12,98 | J4.G4 3,96.31 v3,99 | J2.MP4 165.07,58.14 J2.A12 J2.B1 | J2.B12 J2.A1 165.07,50.29 J2.MP3
  other vias: 162,61 168.5,61.4 160,52 42,66 37,58 66,105 46.9,106.8 24,106 89,28 152,16
  pour Top: -10.85,-15.85 196.85,-15.85 196.85,143.85 -10.85,143.85
  pour Bottom: -13.85,-22.85 203.85,-22.85 203.85,147.85 -13.85,147.85
GPIO8
  Top 0.3: U2.10 19.77,53.99 19.77,54.31 23.04,57.58 R1.2
I2C_PW  (via drill 0.35)
  Top 0.3: C2.1 C1.1 151,16 | 151,16 152.07,14.93 SENSOR2.2 152.07,11.99 | 151,16 151.65,16.65 R1_PINH.2 151.65,23 | 151.65,23 R2_PINH.2 | SENSOR2.6 152.6,11.15 152.6,11.47 152.07,11.99 | 152.07,11.99 151.27,11.2 SENSOR2.8 | v150,23 151.65,23 | v22,73 22,71.18 U2.17
  Bottom 0.3: v150,23 107,23 57,73 v22,73
INT_RTC  (via drill 0.35)
  Top 0.2: U2.8 17.28,52.86 17.28,52.61 21.27,48.62 26.62,48.62 27,49 v27,50 | v54,57 58.55,61.55 67.43,61.55 68.04,61.55 TP15.TP 73.66,69.5 75.99,71.83 R1_PINH1.1 81.9,69.96 84.08,69.96 84.26,69.78 84.26,69.45 U3.3
  Bottom 0.2: v54,57 47,50 v27,50
IO/BOOT  (via drill 0.35)
  Top 0.2: U2.15 24.31,73.31 v25,74 | v44,108 44.43,108.43 C6.1 45.19,108.43 46.41,109.65 U$2.4 U$2.3 51.76,109.65 52.97,108.44 R_BOOT.2
  Bottom 0.2: v44,108 44,93 v25,74
IO/CHANGE  (via drill 0.35)
  Top 0.2: R_CHANGE.2 68.13,108.09 66.57,109.65 U$3.3 U$3.4 61.55,109.65 60.19,108.29 C10.1 58.29,108.29 v58,108 | U2.23 14.74,71.54 14.74,71.79 23.97,81.02 24.26,81.02 47.36,104.13 50.59,104.13 52.46,106 v56,106
  Bottom 0.2: v56,106 v58,108
MISO  (via drill 0.35)
  Top 0.2: R8.1 25.84,95.29 25.18,94.63 23.8,94.63 23.21,95.22 D12.1 22.43,96 v21,96 16.81,100.19 11.81,100.19 5.89,94.28 5.57,94.28 J4.P7 | v26,88 24,88 23.75,88.25 TP6.TP | v9.09,73.91 9.07,73.89 U2.27 | U1.2 38.33,61.52 36.48,61.52 v36,62
  Bottom 0.2: v21,96 26,91 v26,88 26,85 17,76 | 17,76 15,74 9.18,74 v9.09,73.91 | v36,62 29,62 17,74 17,76
MOSI  (via drill 0.35)
  Top 0.2: R7.1 97.86,11.49 97.4,11.03 96.02,11.03 D11.1 94.08,12.97 88,12.97 87.97,13 81.68,13 80.3,14.38 80.3,14.75 J1.14 80.18,15.68 83.41,18.91 83.41,24.59 82,26 82,27.8 v83.2,29 | J4.P3 5.05,89.28 4.07,88.3 4.07,86.72 4.21,86.58 19.12,86.58 | 19.12,86.58 22.5,86.58 TP7.TP | v20.1,85.6 19.12,86.58 | U2.7 16,52.87 v16,51 19,48 29.1,48 | 29.1,48 35.14,48 U1.5 | v29.6,48.5 29.1,48
  Bottom 0.2: v16,51 8,59 8,73.5 v20.1,85.6 | v83.2,29 49.1,29 v29.6,48.5
N$1
  Top 0.3: C1_BAT1.1 Q1.2 152.99,44.79 D2.1 152.86,42.09 IC4.3 152.1,41.33 151.91,41.33 151.74,41.16 151.74,40.34 151.91,40.17 152.1,40.17 IC4.1
N$2
  Top 0.3: R2-USB.1 162.4,55.97 J2.B5
N$3
  Top 0.3: R1_BAT.1 162.79,33.95 CHG_LED.C
N$4
  Top 0.3: U10.1 162.77,36.38 R1_BAT.2
N$5
  Top 0.2: J1.4 85.18,16.72 86.73,18.27 86.87,18.41 88.18,19.72 89.23,19.72 EPD_C1.1
N$6
  Top 0.3: R2-USB1.2 163.06,52.97 J2.A5
N$7
  Top 0.2: D3.1 D4.2 67.22,27.23 C4.1
N$8
  Top 0.3: U10.5 160.17,36.39 R2_BAT.2
N$9
  Top 0.2: J1.5 84.68,16.68 88.35,20.35 EPD_C2.1 89,20.09
N$10
  Top 0.2: J1.18 78.18,17.72 78.58,18.12 80.16,18.12 81.39,19.35 EPD_C6.1
N$11
  Top 0.2: J1.19 77.68,17.68 78.45,18.45 79.37,18.45 EPD_C7.1
N$12
  Top 0.2: 78.97,19.35 EPD_C8.1 78.49,18.77 78,18.77 77.18,17.95 J1.20
N$13
  Top 0.3: IC1.5 33.51,103.2 C_DELAY.1
N$14
  Top 0.2: EPD_C10.1 76.58,19.35 76.18,18.95 J1.22
N$15
  Top 0.3: R_CAPACITOR.1 87.01,76.76 D7.1
N$16
  Top 0.2: EPD_C12.1 74.15,19.31 75.18,18.28 J1.24
PREVGH
  Top 0.2: EPD_C9.1 77.8,19.35 76.68,18.23 J1.21 76.56,14.75 76.56,14.38 76.42,14.24 74.94,14.24 74.8,14.38 74.8,16.75 71.88,19.67 D5.1
PREVGL
  Top 0.2: J1.23 75.68,19.02 EPD_C11.1 75.35,19.39 74.74,20 73.68,20 70.78,22.9 D3.2
RESE  (via drill 0.35)
  Top 0.2: J1.3 85.68,16.48 87.2,18 v88,18 | Q3.2 v61.5,23.9 59.98,25.42 R3.2
  Bottom 0.2: v88,18 67.4,18 v61.5,23.9
RESE'
  Top 0.2: SJ1.2 59.25,26.88 R3.1 56.17,29.64 R2.2
RESET  (via drill 0.35)
  Top 0.2: C5.1 20.19,108.36 21.48,109.65 U$1.4 U$1.3 26.77,109.65 28.13,108.29 R_RESET.2 v29.59,108.29 v29.6,108.3 | v26.8,103.2 IC1.1 | U2.3 10.34,51.66 v11,51
  Bottom 0.2: v29.6,108.3 29.6,106 v26.8,103.2 24.2,103.2 7,86 7,55 v11,51
RTC_RST  (via drill 0.35)
  Top 0.2: U2.16 23.63,70.36 23.63,70.11 23.77,69.97 24.85,69.97 25.58,70.7 v27.6,70.7 | U3.4 82.99,67.96 82.99,66.63 76.96,60.6 v59.1,60.6
  Bottom 0.2: v27.6,70.7 49,70.7 v59.1,60.6
RX
  Top 0.2: U2.24 12.88,74.6 TP2.TP
SCK  (via drill 0.35)
  Top 0.2: R6.1 98.08,14.29 97.42,13.63 96.26,13.63 95.56,14.33 D10.1 94.31,13.3 88.13,13.3 88.11,13.32 81.86,13.32 80.8,14.38 80.8,14.75 J1.13 80.68,15.72 83.73,18.77 83.73,25.27 83,26 83,27.5 v83.6,28.1 | J4.P5 5.57,92.08 5.69,92.08 6.39,92.78 18.52,92.78 v18.6,92.7 | v22,82 22.25,82.25 TP8.TP | U2.6 14.74,52.86 14.74,52.61 15,52.35 v15,51 18.33,47.67 28.33,47.67 | v29,47 28.33,47.67 | U1.6 47.49,60.23 47.49,59.37 35.79,47.67 28.33,47.67
  Bottom 0.2: v22,82 22,89.3 v18.6,92.7 7.67,81.77 7.67,56.53 8.4,55.8 10.2,55.8 v15,51 | v83.6,28.1 47.9,28.1 v29,47
SCL  (via drill 0.35)
  Top 0.2: SENSOR2.4 153.7,13.83 v153.7,15.3 | J3.4 156.5,20.8 v154.3,23 153.02,23 R2_PINH.1 152.95,26.05 v148,31 | U4.7 145.38,60.6 v146.6,60.6 146.6,58.6 145,57 92,57 | 92,57 89.94,57 U3.16 | U2.20 18.55,71.54 18.55,71.79 18.69,71.93 19.49,71.93 22.97,75.4 57.6,75.4 v65,68 | v91,58 92,57
  Bottom 0.2: v154.3,23 154.3,15.9 v153.7,15.3 | v148,31 148,59.2 v146.6,60.6 | v65,68 76,57 90,57 v91,58
SDA  (via drill 0.35)
  Top 0.2: SENSOR2.3 152.87,18 | 152.87,18 152.87,19.92 R1_PINH.1 152.95,21.95 152.37,22.53 152.37,25.63 v147,31 | 152.87,18 154.67,19.8 J3.3 | U3.15 87.02,58.65 87.02,58.32 88.17,57.17 | 88.17,57.17 89.34,56 v147,56 147,60.32 147.08,60.4 147.08,60.8 146.8,61.08 145.41,61.08 U4.8 | U2.19 19.82,71.54 19.82,71.79 23.03,75 57,75 v65,67 | v86,56 87.17,57.17 88.17,57.17
  Bottom 0.2: v147,31 v147,56 | v65,67 76,56 v86,56
SRC
  Top 0.2: 67.17,19.67 D5.2 66.05,18.38 66.05,17 | 64,19.05 64,24 63,25 63,26.84 C4.2 | 66.05,17 L1.1 | 66.05,17 64.03,19.02 64,19.05 | Q3.3 62.51,20.54 64,19.05
SS_SD  (via drill 0.35)
  Top 0.2: R10.1 25.92,92.19 25.26,91.53 23.88,91.53 D8.1 23,92.23 | U2.4 11.61,51.39 v12,51 | v21,93 22.23,93 23,92.23 | 23,92.23 18.81,92.23 18.8,92.22 9.41,92.22 J4.P2
  Bottom 0.2: v12,51 7.35,55.65 7.35,84.35 16.48,93.48 20.52,93.48 v21,93
TX
  Top 0.2: U2.25 11.61,74.88 TP1.TP
USB_D+  (via drill 0.35)
  Top 0.2: U2.14 25.76,52 v36,52 | v78,51 79,52 149.53,52 150.06,52.53 153.33,52.53 D1.1
  Bottom 0.2: v78,51 62,51 55.2,57.8 52.8,57.8 47,52 v36,52
USB_D-  (via drill 0.35)
  Top 0.2: U2.13 23.63,52.86 23.63,52.61 25.24,51 v36,51 | v78,49 151.93,49 153.75,50.82 D1.3
  Bottom 0.2: v78,49 63,49 54.52,57.48 53.48,57.48 47,51 v36,51
VBAT
  Top 0.3: C2_BAT.1 U10.3 162.46,40.94 Q1.3 165.1,45.74 167,47.64 167,61 166.2,61.8 164,61.8 152,61.8 | U4.2 U4.3 142.69,60.83 142.69,61.58 142.9,61.8 152,61.8 | 152,61.8 151.37,62.43 TP3.TP
VBUS
  Top 0.3: C4_USB.1 C5_USB.1 152.52,58.2 PFMF.050.1.2 155.06,57.95 | D2.2 155.06,48.95 155.06,51 | D2.2 R1_PWRBUS.2 | D2.2 155.49,46.76 Q1.1 155.56,46.03 156.29,45.3 156.29,44.82 160.06,41.05 | 160.06,41.05 U10.4 157.43,40.94 C1_BAT.1 | CHG_LED.A 159,33.66 159,40 160.06,41.05 | 155.06,57.95 153.28,56.17 TP14.TP | 155.06,51 155.06,57.95 | D1.5 155.88,51.63 155.53,51.63 155.37,51.47 155.37,51.32 155.06,51
VRTC
  Top 0.3: R_CAPACITOR.2 88.35,63.35 85.88,60.88 | U3.14 85,60.01 85.88,60.88 | C8.1 93.75,65.2 C10_SUPERCAP.2 85.88,60.88
VUSB
  Top 0.3: PFMF.050.1.1 161,57 163.65,57 163.81,56.84 164.42,56.84 J2.A9 J2.B4 164.57,56.39 165.19,56.39 165.67,55.91 165.67,52.53 165.19,52.04 164.57,52.04 J2.B9 J2.A4
(copper drawn outside any net)
  shapes: Top area x12

## Text on the board
tPlace: GND | 3V3 | MISO | MOSI | SCK | TX | RX | INT_RTC | VBAT | VBUS | GND | EPD_CS | EPD_DC | EPD_RST | EPD_BUSY | EPD_3V3_C | EPD_3V3